# Altium PCB VOLTAGE_PEAK_V2.PcbDoc
Units mil, origin at the board's own origin, x right, y up, seen from the top; angles counter-clockwise.
Board outline 730 x 630 mil, 2 copper layers (Top Layer, Bottom Layer); 7 components, 6 nets, 26 pads, 0 vias.
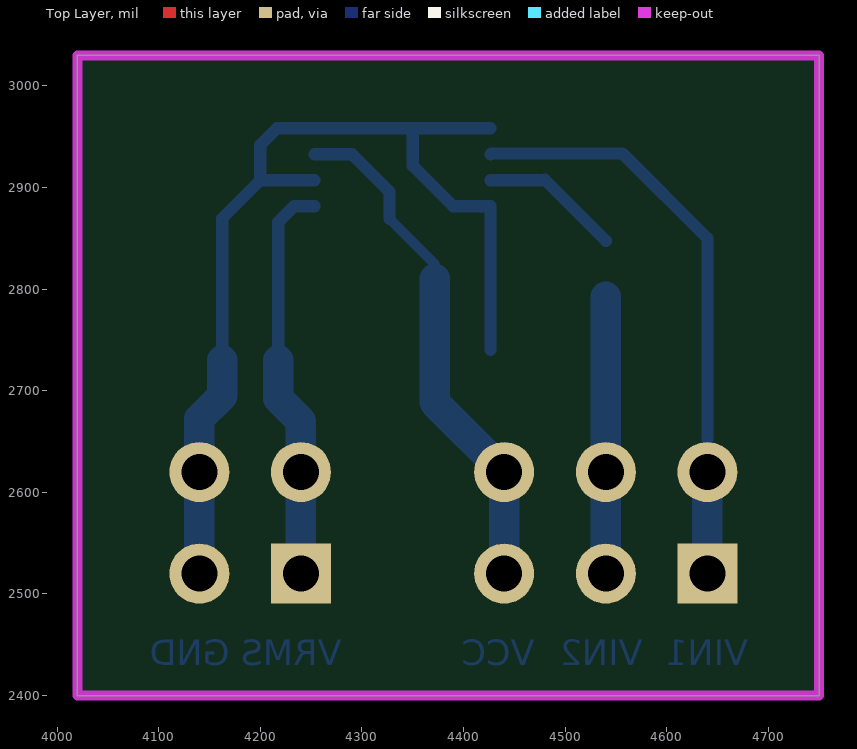
[diagram p0: Top Layer view]
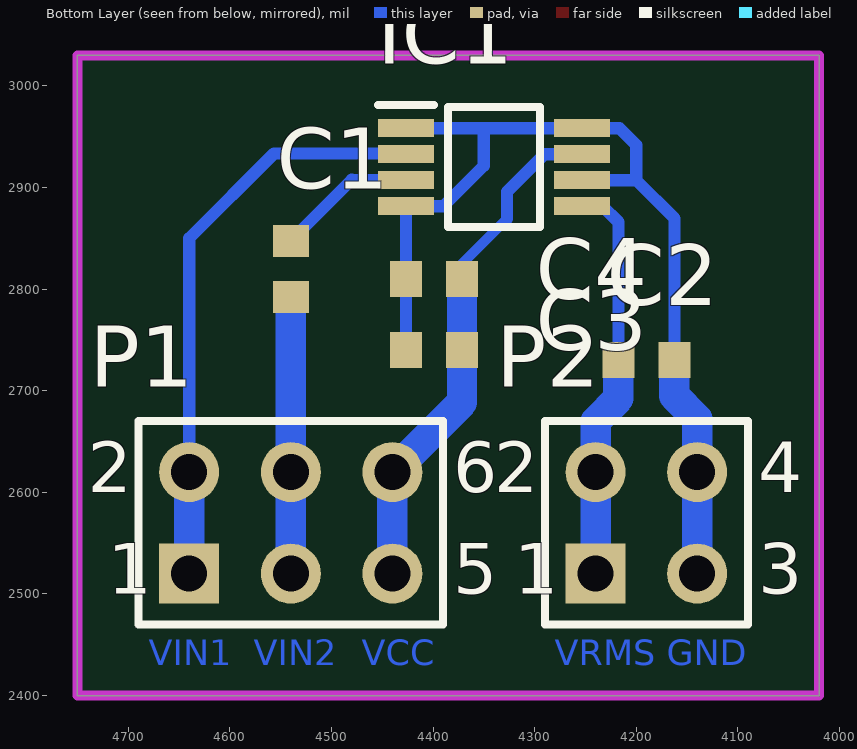
[diagram p1: Bottom Layer view, seen from below]

## Layer stack, top to bottom
Top Solder: solder mask 0.4, Solder Resist, Dk 3.5
Top Layer: signal copper 1.4
Dielectric 1: dielectric 12.6, FR-4, Dk 4.8
Bottom Layer: signal copper 1.4
Bottom Solder: solder mask 0.4, Solder Resist, Dk 3.5

## Board outline
4750,2400 4750,3030 4020,3030 4020,2400

## Design rules (kind name [scope] priority, off if disabled: settings)
Clearance [All] p1: gap=10 ignorepadtopadclearanceinfootprint=FALSE except(0: Arc-Hole Track-Hole SMDPad-SMDPad SMDPad-Hole THPad-Hole Via-Hole Fill-Hole Poly-Hole Region-Hole Text-Hole)
PolygonConnect [All] p1: connectstyle=Relief reliefconductorwidth=10 reliefentries=4 polygonreliefangle="90 Angle" airgapwidth=10
RoomDefinition VOLTAGE_PEAK_V2 [InComponentClass('VOLTAGE_PEAK_V2')] p1: confinementstyle=ConfineIn formatcopy=TRUE lockcomponents=FALSE outline 4750,2400 4020,2400 4020,3030 4750,3030
RoutingLayers [All] p1: top layer_v5=FALSE bottom layer_v5=TRUE
RoutingVias [All] p1: holewidth=28 width=50 viastyle="Through Hole" minholewidth=28 minwidth=50 maxholewidth=28 maxwidth=50
SolderMaskExpansion [All] p1: expansion=4
Width [All] p1: maxlimit=50 minlimit=10 preferedwidth=12 minimp=50.000000 maximp=50.000000 favimp=50.000000
29 further rules are at their usual default settings.

## Components (designator, comment, footprint, x,y, rotation, side; value= is the part's Value field where it differs from the comment)
C1 "Cap" 1608[0603] 4540,2820 r90 bottom value=0.1uF
C2 "Cap" 1608[0603] 4190,2730 r180 bottom value=1uF
C3 "Cap" 1608[0603] 4399.06,2740 r180 bottom value=10uF
C4 "Cap" 1608[0603] 4399.06,2810 r180 bottom value=0.1uF
IC1 "LTC1966CMS8#PBF" SOP65P490X110-8N 4340,2920 r180 bottom
P1 "Header 3X2" HDR2X3 4640,2520 r180 bottom
P2 "Header 2X2" HDR2X2 4240,2520 r180 bottom

## Footprints (in the part's own frame and the unit in brackets; to place one, negate y for a bottom-side part, rotate by r counter-clockwise, add the part's x,y. Pads: shape width x height; smd on the part's side, far side on the other; paste and mask are expansions set on the pad)
1608[0603] [mm] "Chip Capacitor, Body 1.6x0.8mm, IPC High Density"
  rect 0.8x0.9 smd: 1(-0.7,0) 2(0.7,0)
  body extent -0.87,-0.48 0.87,0.48, height 1.3
HDR2X2 [mm] "Connector; Header; 2x2 Position"
  rect 1.5x1.5 hole 0.9: 1(0,0)
  round 1.5 hole 0.9: 2(0,2.54) 3(2.54,0) 4(2.54,2.54)
  silkscreen extent -1.27,-1.27 3.81,3.81
HDR2X3 [mm] "Connector; Header; 3x2 Position"
  rect 1.5x1.5 hole 0.9: 1(0,0)
  round 1.5 hole 0.9: 2(0,2.54) 3(2.54,0) 4(2.54,2.54) 5(5.08,0) 6(5.08,2.54)
  silkscreen extent -1.27,-1.27 6.35,3.81
SOP65P490X110-8N [mm]
  rect 1.4x0.45 smd: 1(-2.2,0.975) 2(-2.2,0.325) 3(-2.2,-0.325) 4(-2.2,-0.975) 5(2.2,-0.975) 6(2.2,-0.325) 7(2.2,0.325) 8(2.2,0.975)
  silkscreen extent -2.9,-1.5 1.15,1.55, body extent -2.45,-1.5 2.45,1.5, height 1.1

## Part data
C1 C2 C3 C4: "Capacitor", LatestRevisionDate=17-Jul-2002, LatestRevisionNote="Re-released for DXP Platform.", PackageDescription="Radial Cap, Thru-Hole; 2 Leads; 0.3 in Pin Spacing", PackageReference=RAD-0.3, Published=8-Jun-2000, Publisher="Altium Limited"
IC1: "Integrated Circuit", Manufacturer_Name="Linear Technology", RS Part Number=7619266P, Datasheet Link=http://docs-emea.rs-online.com/webdocs/10ed/0900766b810ed9a6.pdf, Height=1.1mm, Manufacturer_Part_Number=LTC1966CMS8#PBF, RS Price/Stock=http://uk.rs-online.com/web/p/products/7619266P
P1: "Header, 3-Pin, Dual row", LatestRevisionDate=17-Jul-2002, LatestRevisionNote="Re-released for DXP Platform.", Publisher="Altium Limited"
P2: "Header, 2-Pin, Dual row", LatestRevisionDate=17-Jul-2002, LatestRevisionNote="Re-released for DXP Platform.", Publisher="Altium Limited"

## Nets (pads, with @x,y where several pads share a name; then routed paths per layer and width w, separated by ;. In a path a pad name is that pad's centre, name@x,y a point inside that pad or via, vN(x,y) a via of type N, cw(c..) or ccw(c..) an arc to the next point about the centre after c; other vN are vias at no path point)
GND: C2.2 C3.1 C4.1 IC1.1 IC1.4 IC1.6 IC1.8 P2.3 P2.4 | length 1005.3
  Bottom Layer w12: C2.2 4162.44,2869.65 4200,2907.2 ; IC1.6 4200,2907.2 ; C3.1 C4.1 IC1.4 4389.88,2881.61 4350,2921.5 4350,2958.39 ; IC1.1 4350,2958.39 ; 4200,2907.2 4200,2941.97 4216.42,2958.39 IC1.8 4350,2958.39
  Bottom Layer w30: P2.3 P2.4 4140,2672.44 4162.44,2694.88 C2.2
NetC1_2: C1.2 IC1.3 | length 138.4
  Bottom Layer w12: IC1.3 4479.65,2907.2 4480,2907.56 C1.2
VCC: C3.2 C4.2 IC1.7 P1.5 P1.6 | length 511.7
  Bottom Layer w10: 4327.2,2869.34 4371.5,2825.05 C4.2
  Bottom Layer w12: IC1.7 4290.3,2932.8 4327.2,2895.89 4327.2,2869.34
  Bottom Layer w30: C4.2 C3.2 4371.5,2688.5 P1.6 P1.5
VIN1: IC1.2 P1.1 P1.2 | length 578.3
  Bottom Layer w12: IC1.2 4427.35,2933.53 4556.47,2933.53 4640,2850 P1.2
  Bottom Layer w30: P1.1 P1.2
VIN2: C1.1 P1.3 P1.4 | length 272.4
  Bottom Layer w30: P1.3 P1.4 C1.1
VRMS: C2.1 IC1.5 P2.1 P2.2 | length 397.6
  Bottom Layer w12: C2.1 4217.56,2865.94 4233.23,2881.61 IC1.5
  Bottom Layer w30: C2.1 4217.56,2692.44 4240,2670 P2.2 P2.1

## Keep-outs
Keep-Out Layer:
  lines w10: 4020,2400 4020,3030 4750,3030 4750,2440 4750,2400 4020,2400

## Other copper
Bottom Layer:
  text "GND" at 4170,2430 h25
  text "VRMS" at 4280,2430 h25
  text "VCC" at 4470,2430 h25
  text "VIN2" at 4576.47,2430 h25
  text "VIN1" at 4680,2430 h25

## Text inside footprints (layer, text, board x,y; h text height)
P1: Bottom Overlay "6" at 4380,2600 h50; Bottom Overlay "5" at 4380,2500 h50; Bottom Overlay "2" at 4740,2600 h50; Bottom Overlay "1" at 4720,2500 h50
P2: Bottom Overlay "1" at 4320,2500 h50; Bottom Overlay "2" at 4340,2600 h50; Bottom Overlay "4" at 4080,2600 h50; Bottom Overlay "3" at 4080,2500 h50